# Altium PCB Copy of hazi_kiindulas2.PcbDoc
Units mil, origin at the board's own origin, x right, y up, seen from the top; angles counter-clockwise.
Board outline 3550 x 2300 mil, 2 copper layers (Top Layer, Bottom Layer); 29 components, 57 nets, 143 pads, 0 vias.
Unrouted connection lines stored in the file: 46.
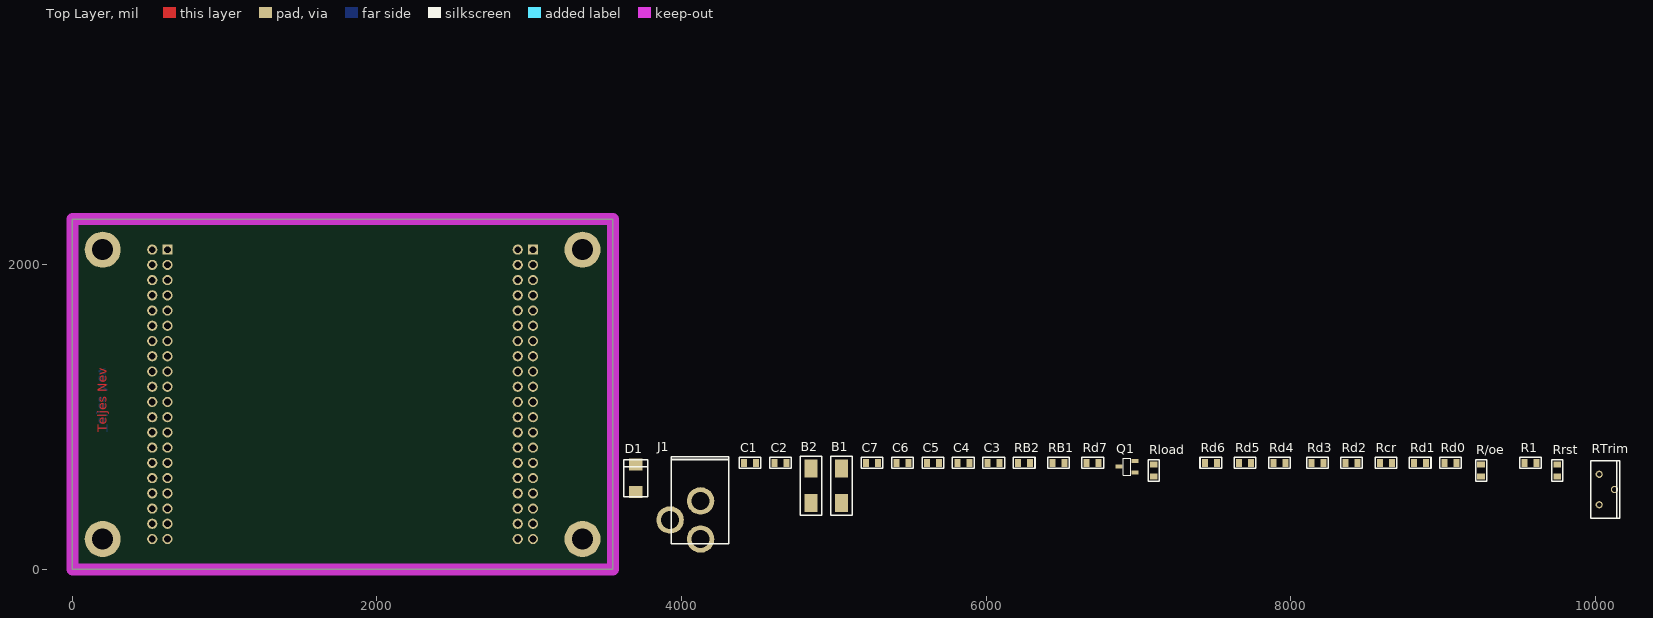
[diagram p0: Top Layer view]
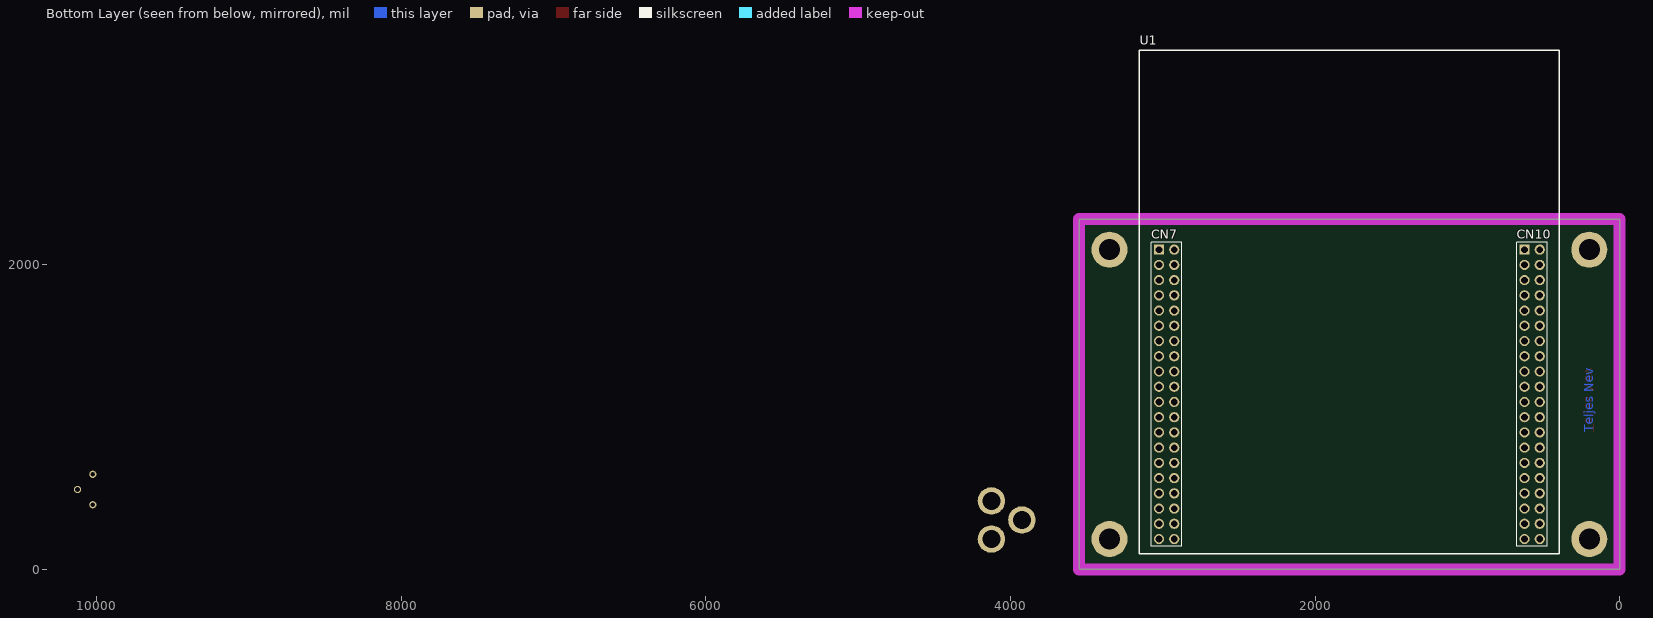
[diagram p1: Bottom Layer view, seen from below]

## Layer stack, top to bottom
Top Solder: solder mask 0.4, Solder Resist, Dk 3.5
Top Layer: signal copper 1.4
Dielectric 1: dielectric 12.6, FR-4, Dk 4.8
Bottom Layer: signal copper 1.4
Bottom Solder: solder mask 0.4, Solder Resist, Dk 3.5

## Board outline
0,0 3550,0 3550,2300 0,2300

## Design rules (kind name [scope] priority, off if disabled: settings)
Clearance [All] p1: gap=10 ignorepadtopadclearanceinfootprint=FALSE except(0: Arc-Hole Track-Hole SMDPad-Hole THPad-Hole Via-Hole Fill-Hole Poly-Hole Region-Hole Text-Hole)
PolygonConnect [All] p1: connectstyle=Relief reliefconductorwidth=10 reliefentries=4 polygonreliefangle="90 Angle" airgapwidth=10
RoomDefinition Nucleo [InComponentClass('Nucleo')] p1: confinementstyle=ConfineIn formatcopy=TRUE lockcomponents=FALSE outline 3600,100 10275,100 10275,875 3600,875
RoutingVias [All] p1: holewidth=28 width=50 viastyle="Through Hole" minholewidth=28 minwidth=50 maxholewidth=28 maxwidth=50
SolderMaskExpansion [All] p1: expansion=4
Width [All] p1: maxlimit=10 minlimit=10 preferedwidth=10
30 further rules are at their usual default settings.

## Components (designator, comment, footprint, x,y, rotation, side; value= is the part's Value field where it differs from the comment)
B1 "Button small" FP_BTN_SMD_3x6 5050,550 r90 top
B2 "Button small" FP_BTN_SMD_3x6 4850,550 r90 top
C1 "100nF" FP_0805_CAP_085 4450,700 r0 top
C2 "100nF" FP_0805_CAP_085 4650,700 r0 top
C3 "100nF" FP_0805_CAP_085 6050,700 r0 top
C4 "100nF" FP_0805_CAP_085 5850,700 r0 top
C5 "100nF" FP_0805_CAP_085 5650,700 r0 top
C6 "100nF" FP_0805_CAP_085 5450,700 r0 top
C7 "100nF" FP_0805_CAP_085 5250,700 r0 top
D1 "ZENER" FP_SMB 3700,600 r90 top
J1 "2.xmm" FP_DC_TAP_ANYA 4125,200 r0 top
Q1 "PMOS" FP_SOT23-3 6925,675 r0 top
R1 "3K9" FP_0805_RES 9575,700 r0 top
R/oe "100K" FP_0805_RES 9250,650 r90 top
RB1 "100K" FP_0805_RES 6475,700 r0 top
RB2 "100K" FP_0805_RES 6250,700 r0 top
Rcr "27R" FP_0805_RES 8625,700 r0 top
Rd0 "1K" FP_0805_RES 9050,700 r0 top
Rd1 "1K" FP_0805_RES 8850,700 r0 top
Rd2 "1K" FP_0805_RES 8400,700 r0 top
Rd3 "1K" FP_0805_RES 8175,700 r0 top
Rd4 "1K" FP_0805_RES 7925,700 r0 top
Rd5 "1K" FP_0805_RES 7700,700 r0 top
Rd6 "1K" FP_0805_RES 7475,700 r0 top
Rd7 "1K" FP_0805_RES 6700,700 r0 top
Rload "4K7" FP_0805_RES 7100,650 r90 top
Rrst "10K" FP_0805_RES 9750,650 r90 top
RTrim "RPot" FP_RES_POT 10025,425 r90 top value=10-2200R
U1 "NUCLEO-F446RE" FP_NUCLEO-64 3025,2100 r180 bottom locked

## Footprints (in the part's own frame and the unit in brackets; to place one, negate y for a bottom-side part, rotate by r counter-clockwise, add the part's x,y. Pads: shape width x height; smd on the part's side, far side on the other; paste and mask are expansions set on the pad)
FP_0805_CAP_085 [mm] "0805 kapacitás YAGEO 0.85mm magas"
  rect 1x1.3 smd: 1(-1,0) 2(1,0)
  silkscreen extent -1.8,-0.9 1.8,0.9, body extent -1,-0.64 1.03,0.64, height 0.85
FP_0805_RES [mm] "0805 ellenállás"
  rect 1x1.3 smd: 1(-1,0) 2(1,0)
  silkscreen extent -1.8,-0.9 1.8,0.9, body extent -1,-0.62 1,0.63, height 0.62
FP_BTN_SMD_3x6 [mm] "TACT 3x 6 2P"
  rect 3x2.2 smd: 1(-2.9,0) 2(2.9,0)
  silkscreen extent -4.9,-1.8 4.9,1.8, body extent -2.9,-1.6 2.9,1.6, height 3.5
FP_DC_TAP_ANYA [mil] "DC HEBA25 TÁPFESZÜLTSÉG ALJZAT ZÁRT, NYÁKBA 90°"
  round 180 hole 118: 1(0,0) 2(0,250) 3(-200,125)
  silkscreen extent -193,-30 185,541, body extent -190,-31 183,539, height 440
FP_NUCLEO-64 [mm]
  round 1.7 hole 1.1: 0(0,-48.26) 0(2.54,-48.26) 0(60.96,-48.26) 0(63.5,-48.26) 2(2.54,0) 3(0,-2.54) 4(2.54,-2.54) 5(0,-5.08) 6(2.54,-5.08) 7(0,-7.62) 8(2.54,-7.62) 9(0,-10.16) 10(2.54,-10.16) 11(0,-12.7) 12(2.54,-12.7) 13(0,-15.24) 14(2.54,-15.24) 15(0,-17.78) 16(2.54,-17.78) 17(0,-20.32) 18(2.54,-20.32) 19(0,-22.86) 20(2.54,-22.86) 21(0,-25.4) 22(2.54,-25.4) 23(0,-27.94) 24(2.54,-27.94) 25(0,-30.48) 26(2.54,-30.48) 27(0,-33.02) 28(2.54,-33.02) 29(0,-35.56) 30(2.54,-35.56) 31(0,-38.1) 32(2.54,-38.1) 33(0,-40.64) 34(2.54,-40.64) 35(0,-43.18) 36(2.54,-43.18) 37(0,-45.72) 38(2.54,-45.72) 40(63.5,0) 41(60.96,-2.54) 42(63.5,-2.54) 43(60.96,-5.08) 44(63.5,-5.08) 45(60.96,-7.62) 46(63.5,-7.62) 47(60.96,-10.16) 48(63.5,-10.16) 49(60.96,-12.7) 50(63.5,-12.7) 51(60.96,-15.24) 52(63.5,-15.24) 53(60.96,-17.78) 54(63.5,-17.78) 55(60.96,-20.32) 56(63.5,-20.32) 57(60.96,-22.86) 58(63.5,-22.86) 59(60.96,-25.4) 60(63.5,-25.4) 61(60.96,-27.94) 62(63.5,-27.94) 63(60.96,-30.48) 64(63.5,-30.48) 65(60.96,-33.02) 66(63.5,-33.02) 67(60.96,-35.56) 68(63.5,-35.56) 69(60.96,-38.1) 70(63.5,-38.1) 71(60.96,-40.64) 72(63.5,-40.64) 73(60.96,-43.18) 74(63.5,-43.18) 75(60.96,-45.72) 76(63.5,-45.72)
  rect 1.7x1.7 hole 1.1: 1(0,0) 39(60.96,0)
  silkscreen extent -3.3,-50.72 66.72,33.25, body extent -3.3,-50.72 66.72,33.25, height 11
FP_RES_POT [mm] "BOURNS - 3386H-1-103LF - TRIMMER, 10K"
  round 1.2 hole 0.8: 1(0,0) 2(2.54,-2.54) 3(5.08,0)
  silkscreen extent -2.29,-3.43 7.37,1.4, body extent -1.78,-3.55 7.87,1.41, height 9.53
FP_SMB [mm] "DO214-AA tok (SMB)"
  rect 2x2.3 smd: 1(-2.3,0) 2(2.3,0)
  silkscreen extent -3.1,-2 3.1,2, body extent -2.7,-1.8 2.7,1.8, height 2.32
FP_SOT23-3 [mm] "SOT23-3 tok"
  rect 1.2x0.65 smd: 1(1.327,-0.95) 2(1.327,0.95) 3(-1.327,0)
  silkscreen extent -0.64,-1.4 0.64,1.4, body extent -1.27,-1.46 1.27,1.46, height 0.97

## Part data
B1 B2: "Push button", Name="TACT 3x 6 2P SPST 1 TS-363 (FEM) SMD 3.5x6mm H=4.3mm", Reference=45-08-58, Supplier=Lomex
C1 C2 C3 C4 C5 C6 C7: library part "CAP 100nF", "Capacitor", Tolerance=10%, Voltage=50V, Name="100nF 0805 10% 50V X7R 0805B104K500CT (WAL)", Reference=82-10-76, Supplier=Lomex
D1: "Zener Diode", Name="5.6V 3W 1SMB5919BT3G (ONS) CASE403A SMB (DO-214AA)", Reference=85-00-39, Supplier=Lomex, U_Z=5.6
J1: library part DC_TAP_ANYA, "2.xmm DC HEBA25 TÁPFESZÜLTSÉG ALJZAT ZÁRT, NYÁKBA 90°", Name="TÁP DC ANYA 5.5/2.1/9.5mm DCS-5521-5", Reference=43-07-67, Supplier=Lomex
Q1: "MOSFET, P CH", Name="BSS84 (FAI) P-FET 50V 0.13A Rds<10R SOT-23 ½13*½", Reference=86-03-27, Supplier=Lomex
R1: library part "RES 3K9", "Resistor", Power=125mW, Tolerance=5%, Name="3K90 0805 5% CR-05JL7---3K9 0.125W (VIK)", Reference=81-10-94, Supplier=Lomex
R/oe RB1 RB2: library part "RES 100K", "Resistor", Power=125mW, Tolerance=5%, Name="100K 0805 5% CR-05JL7--100K 0.125W (VIK)", Reference=81-11-11, Supplier=Lomex
Rcr: library part "RES 27R", "Resistor", Power=125mW, Tolerance=5%, Name="27R0 0805 5% CR-05JL7---27R 0.125W (VIK)", Reference=81-10-68, Supplier=Lomex
Rd0 Rd1 Rd2 Rd3 Rd4 Rd5 Rd6 Rd7: library part "RES 1K", "Resistor", Power=125mW, Tolerance=5%, Name="1K00 0805 5% CR-05JL7----1K 0.125W (VIK)", Reference=81-10-87, Supplier=Lomex
Rload: library part "RES 4K7", "Resistor", Power=125mW, Tolerance=5%, Name="4K70 0805 5% WR08X472JTL 0.125W (WAL)", Reference=81-28-05, Supplier=Lomex
Rrst: library part "RES 10K", "Resistor", Power=125mW, Tolerance=5%, Name="10K0 0805 5% CR-05JL7---10K 0.125W (VIK)", Reference=81-10-99, Supplier=Lomex
RTrim: "Potentiometer", 5="Enter the Resistance value and the set point into parameter fields.", Name="2K20 PT10LV10 (KEN) D=10 TOP ADJ. 5x10", Reference=05-07-17, Supplier=Lomex
U1: Name="Nucleo F446RE", Reference=NUCLEO, Supplier=Tanszék

## Free pads (board coordinates)
  round 236.22 hole 137.8: ""(200,200) ""(200,2100) ""(3350,200) ""(3350,2100)

## Nets (pads, with @x,y where several pads share a name; then routed paths per layer and width w, separated by ;. In a path a pad name is that pad's centre, name@x,y a point inside that pad or via, vN(x,y) a via of type N, cw(c..) or ccw(c..) an arc to the next point about the centre after c; other vN are vias at no path point)
3V3Acc: C6.2 C7.2 U1.16
5VLCD: C3.2 C4.2 C5.2 U1.18
+3: RB1.2 RB2.2
+5: D1.2 R/oe.2 U1.6
/CS1: 
/CS2: 
B0: 
B1: 
B2: 
B3: 
B4: 
B5: 
B6: 
B7: 
D/I: 
E: 
GND: B1.2 B2.2 C1.1 C2.1 C3.1 C4.1 C5.1 C6.1 C7.1 D1.1 J1.2 Q1.2 R1.1 Rrst.1 U1.8 U1.19 U1.20 U1.22 U1.47 U1.58
NetA1_14: U1.41
NetA1_15: U1.43
NetA1_19: U1.54
NetA1_20: U1.63
NetA1_21: U1.64
NetA1_22: U1.66
NetB1_1: B1.1 C2.2 RB1.1 U1.65
NetB2_1: B2.1 C1.2 RB2.1 U1.67
NetF1_1: J1.1
NetLCD1_3: R1.2 RTrim.3
NetLCD1_18: RTrim.2
NetLCD1_20: Rcr.2
NetQ1_1: Q1.1 Rload.2
NetQ1_2: Q1.3 Rcr.1
NetR/oe_1: R/oe.1 U1.61
NetRd0_1: Rd0.1 U1.38
NetRd0_2: Rd0.2
NetRd1_1: Rd1.1 U1.36
NetRd1_2: Rd1.2
NetRd2_1: Rd2.1 U1.35
NetRd2_2: Rd2.2
NetRd3_1: Rd3.1 U1.37
NetRd3_2: Rd3.2
NetRd4_1: Rd4.1 U1.72
NetRd4_2: Rd4.2
NetRd5_1: Rd5.1 U1.44
NetRd5_2: Rd5.2
NetRd6_1: Rd6.1 U1.42
NetRd6_2: Rd6.2
NetRd7_1: Rd7.1 U1.57
NetRd7_2: Rd7.2
NetRload_1: Rload.1 U1.55
NetU1_1: U1.1
NetU1_3: U1.3
NetU1_50: U1.50
NetU1_52: U1.52
NetU1_59: U1.59
NetU1_71: U1.71
R/W: 
RST: Rrst.2
pads on no net: J1.3 RTrim.1 U1.0 U1.2 U1.4 U1.5 U1.7 U1.9 U1.10 U1.11 U1.12 U1.13 U1.14 U1.15 U1.17 U1.21 U1.23 U1.24 U1.25 U1.26 U1.27 U1.28 U1.29 U1.30 U1.31 U1.32 U1.33 U1.34 U1.39 U1.40 U1.45 U1.46 U1.48 U1.49 U1.51 U1.53 U1.56 U1.60 U1.62 U1.68 U1.69 U1.70 U1.73 U1.74 U1.75 U1.76

## Keep-outs
Keep-Out Layer:
  the board outline again, w78.74

## Other copper
Top Layer:
  text "Teljes Nev" at 225,900 h60 r90
Bottom Layer:
  text "Teljes Nev" at 175,900 h60 r270

## Silkscreen, mask and mechanical layers (free items; w line width, h text height)
Top Solder:
  the board outline again, w10

## Text inside footprints (layer, text, board x,y; h text height)
U1: Bottom Overlay "CN10" at 675,2170 h60; Bottom Overlay "CN7" at 3075,2170 h60